# Altium PCB PCB_2.PcbDoc
Units mil, origin at the board's own origin, x right, y up, seen from the top; angles counter-clockwise.
Board outline 3571.53 x 1636.53 mil, 2 copper layers (Top Layer, Bottom Layer); 40 components, 24 nets, 88 pads, 2 vias.
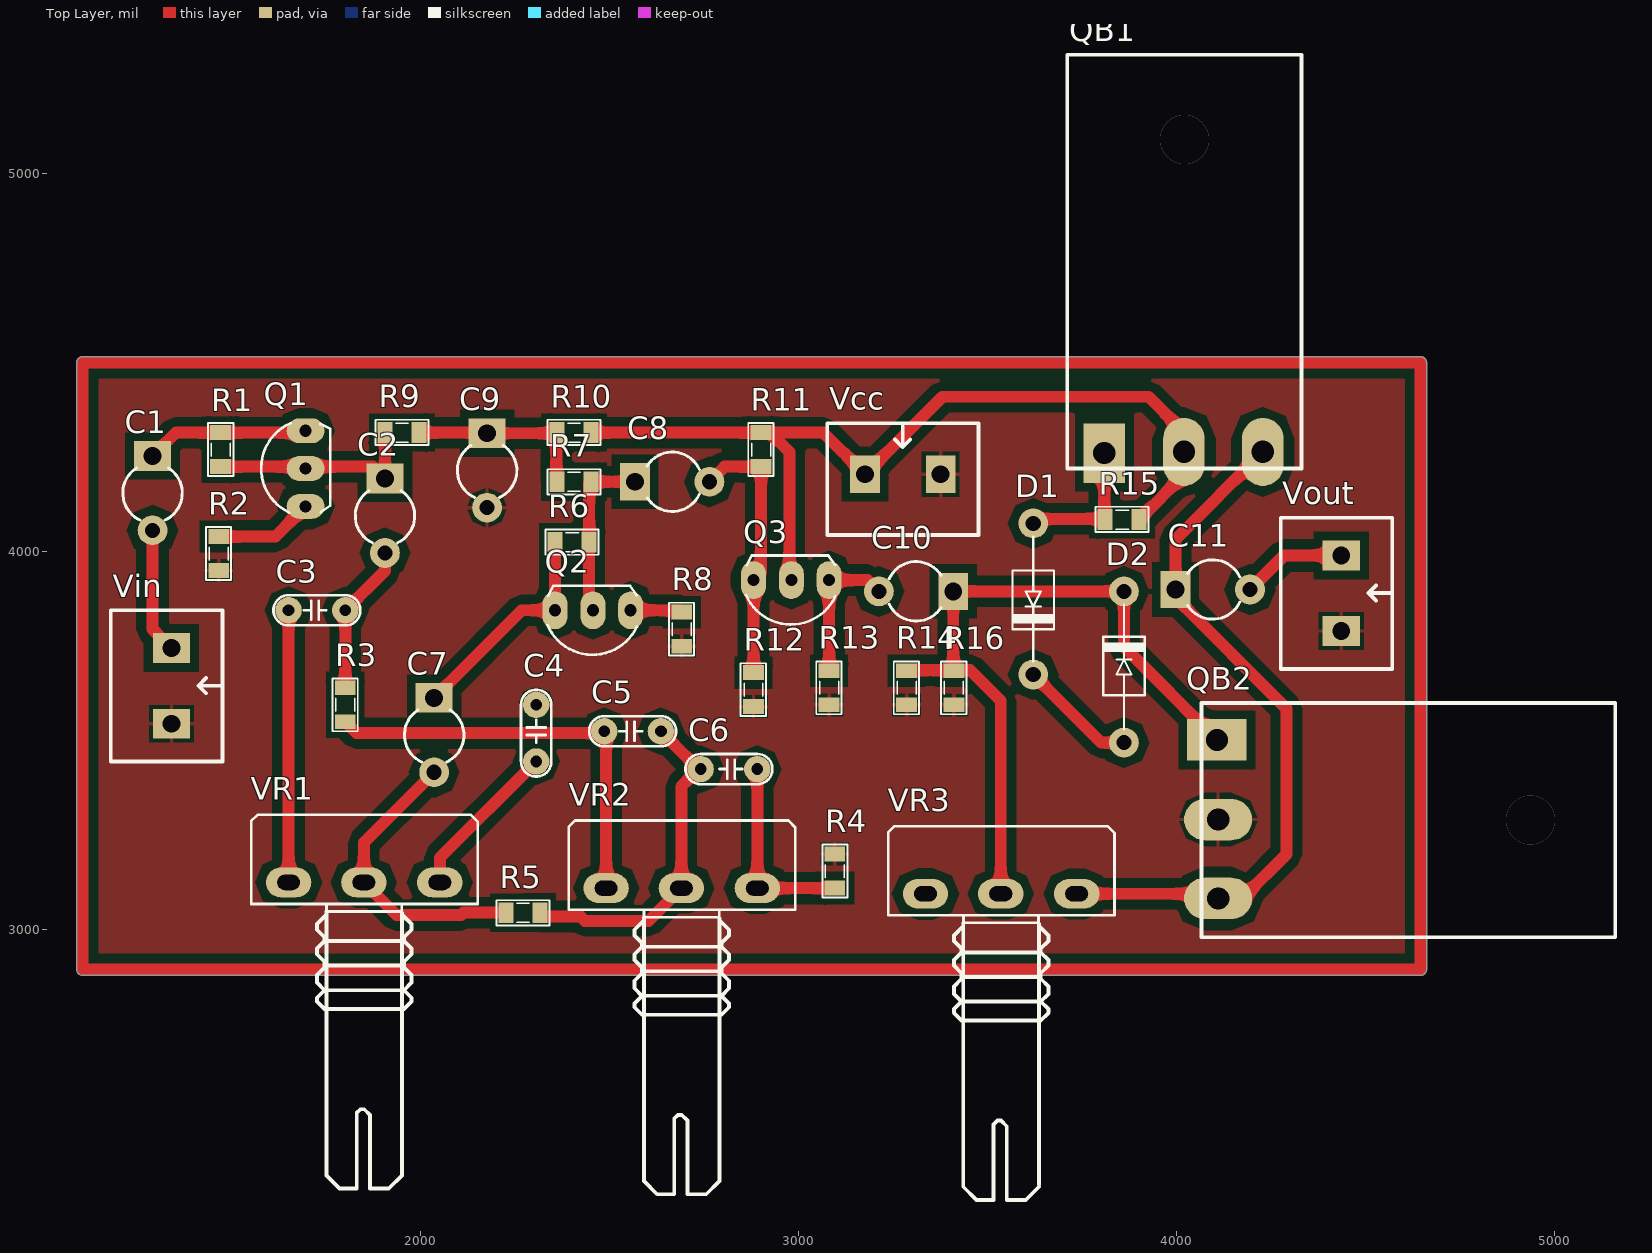
[diagram p0: Top Layer view]
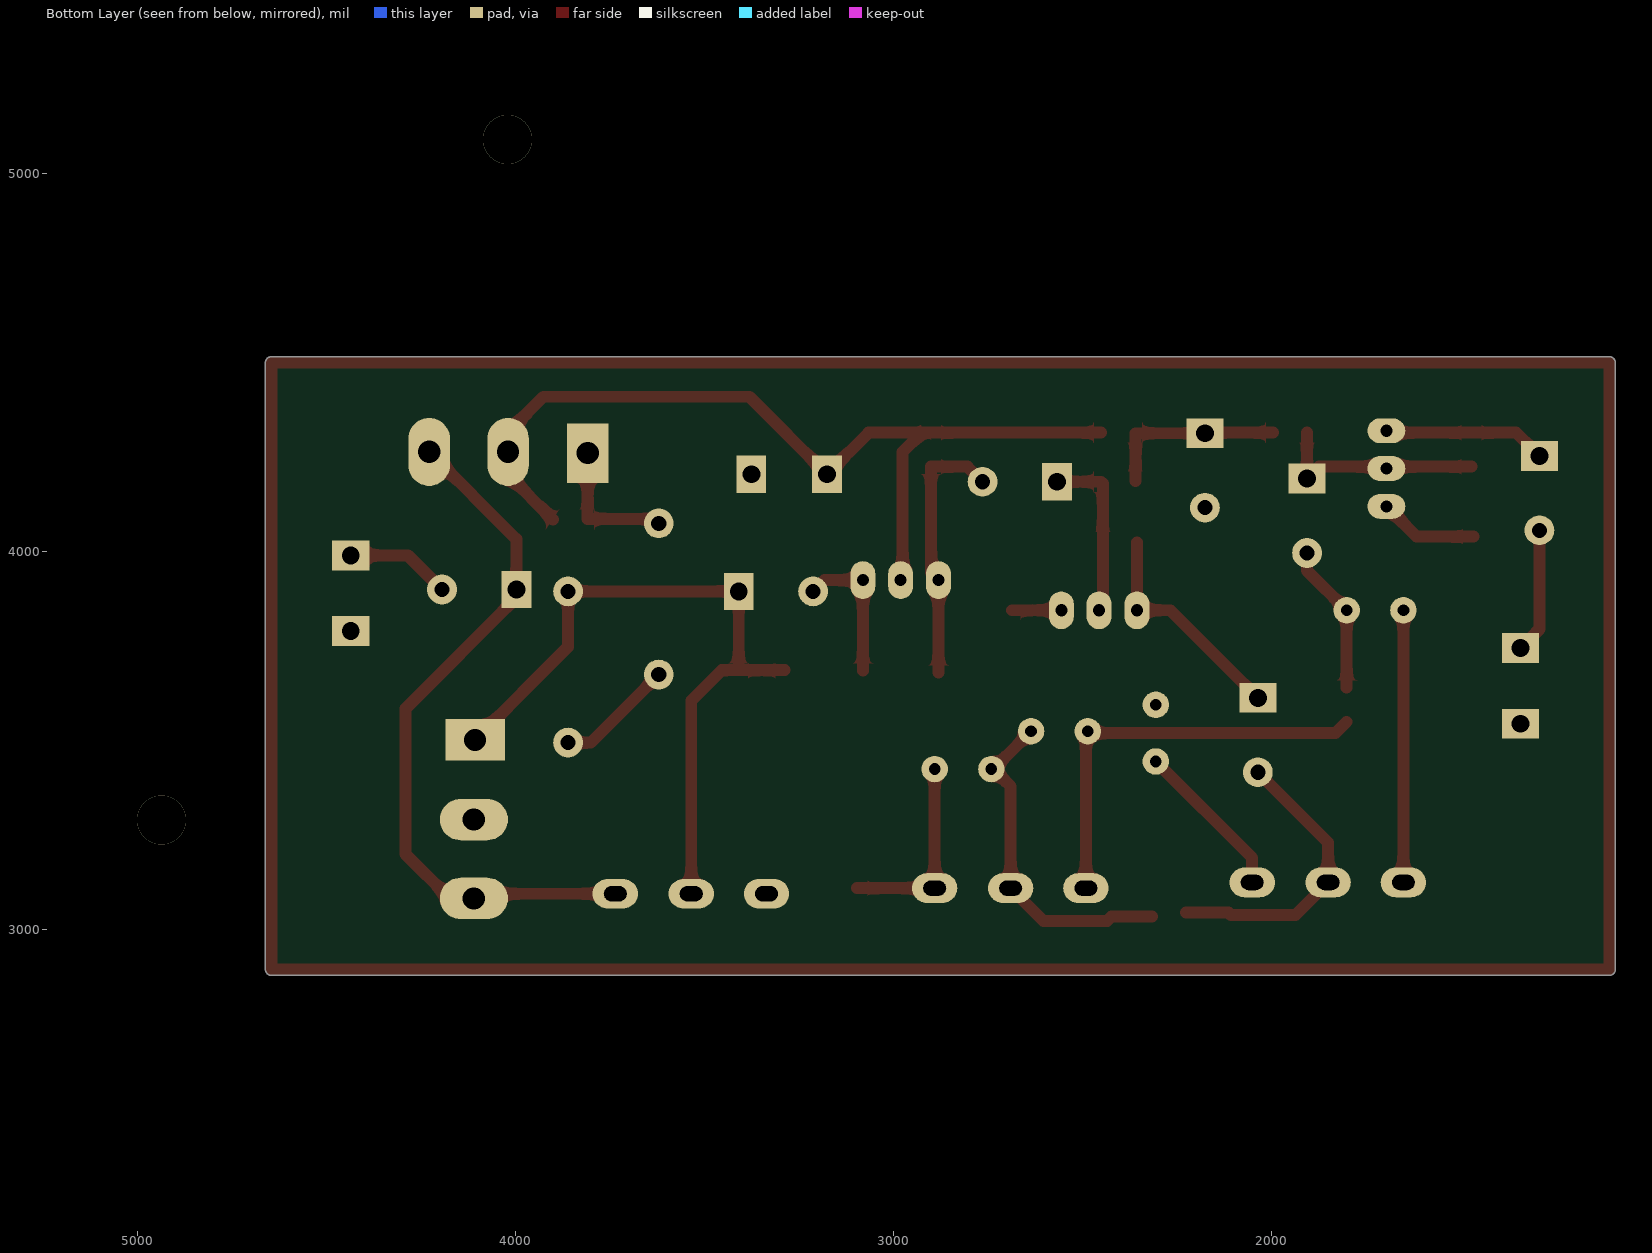
[diagram p1: Bottom Layer view, seen from below]
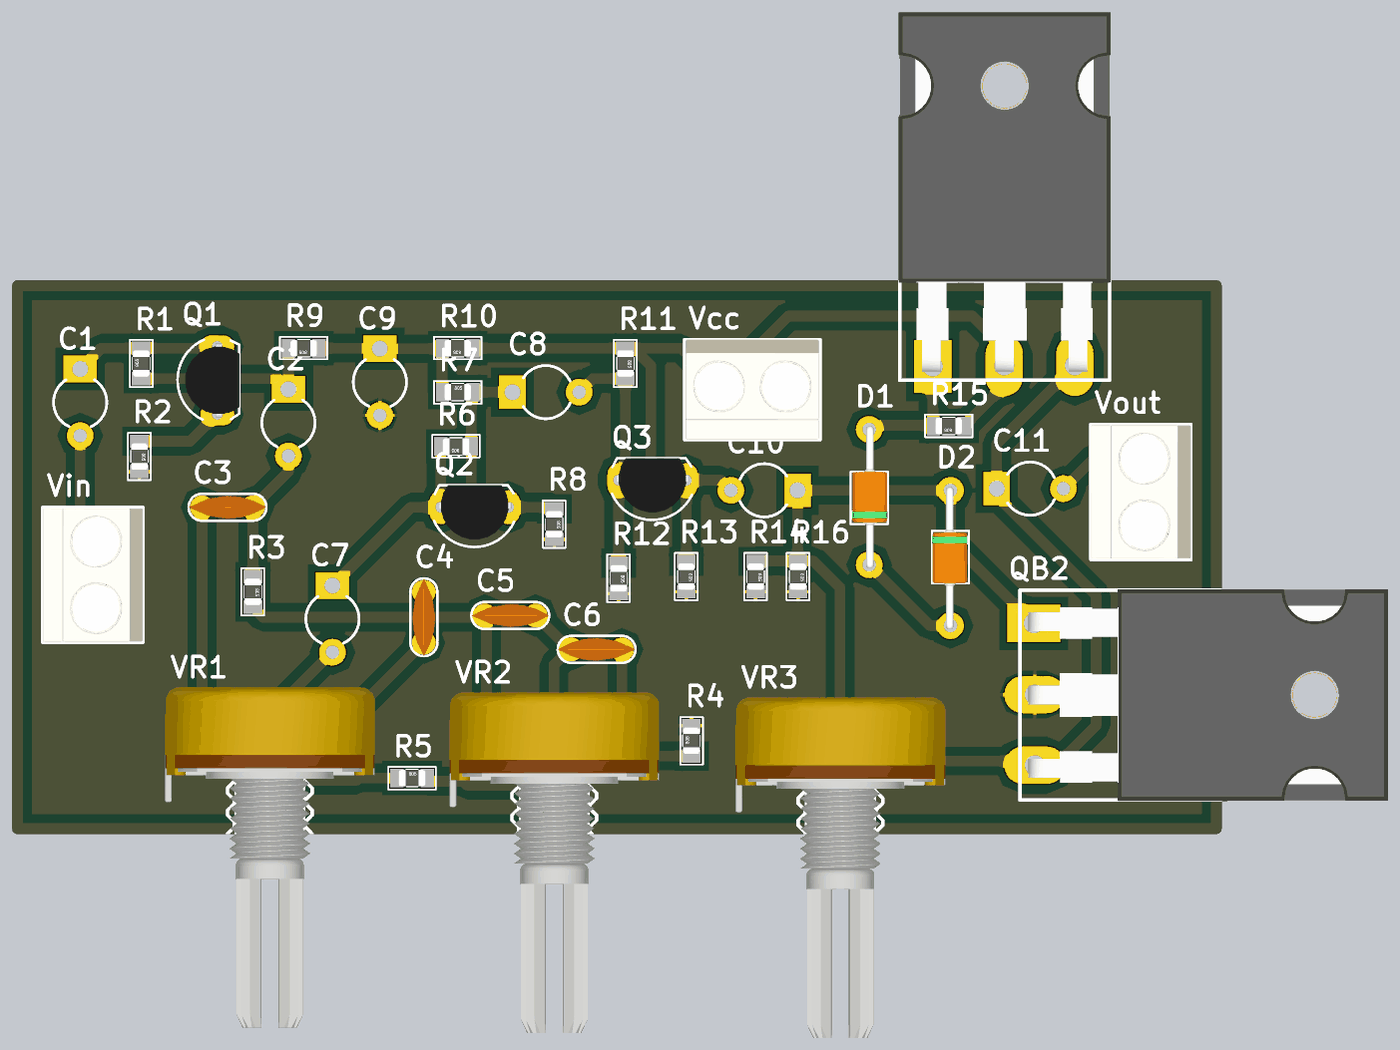
[diagram p2: 3D render of the assembled board from above, using the file's embedded part models]

## Layer stack, top to bottom
Top Solder: solder mask 0.4, Solder Resist, Dk 3.5
Top Layer: signal copper 1.4
Dielectric 1: dielectric 12.6, FR-4, Dk 4.8
Bottom Layer: signal copper 1.4
Bottom Solder: solder mask 0.4, Solder Resist, Dk 3.5

## Board outline
1105,2879.24 cw(c1105,2895) 1089.24,2895 1089.24,4500 cw(c1105,4500) 1105,4515.76 4645,4515.76 cw(c4645,4500) 4660.76,4500 4660.76,2895 cw(c4645,2895) 4645,2879.24

## Design rules (kind name [scope] priority, off if disabled: settings)
Clearance [All] p1: gap=23.62
PolygonConnect [All] p1: connectstyle=Relief reliefconductorwidth=10 reliefentries=4 polygonreliefangle="90 Angle" airgapwidth=10
RoutingVias [All] p1: holewidth=28 width=50 viastyle="Through Hole" minholewidth=28 minwidth=50 maxholewidth=28 maxwidth=50
SolderMaskExpansion [All] p1: expansion=4
Width [All] p1: maxlimit=39.37 minlimit=31.5 preferedwidth=31.5
30 further rules are at their usual default settings.

## Components (designator, comment, footprint, x,y, rotation, side; value= is the part's Value field where it differs from the comment)
C1 "Cap2" CAPR5-4X5 1290,4155 r270 top
C2 "Cap2" CAPR5-4X5 1905,4095 r270 top
C3 "Cap Non-Pol" CN1.5 1650,3845 r0 top
C4 "Cap Non-Pol" CN1.5 2305,3595 r270 top
C5 "Cap Non-Pol" CN1.5 2485,3525 r0 top
C6 "Cap Non-Pol" CN1.5 2890,3425 r180 top
C7 "Cap2" CAPR5-4X5 2035,3515 r270 top
C8 "Cap2" CAPR5-4X5 2665,4185 r0 top
C9 "Cap2" CAPR5-4X5 2175,4215 r270 top
C10 "Cap2" CAPR5-4X5 3310,3895 r180 top
C11 "Cap2" CAPR5-4X5 4095,3900 r0 top
D1 "Diode" DIO-1A 3620,4075 r270 top
D2 "Diode" DIO-1A 3860,3495 r90 top
Q1 "C1815" QTO-92 1695,4220 r90 top
Q2 "C1815" QTO-92 2455,3845 r180 top
Q3 "C1815" QTO-92 2980,3925 r180 top
QB1 "2SD718" TO247h 3805,4260 r0 top
QB2 "2SB688" TO247h 4105,3505 r270 top
R1 "1Meg" RES-SMD-0805 1470,4270 r90 top
R2 "220" RES-SMD-0805 1465,3995 r270 top
R3 "10k" RES-SMD-0805 1800,3595 r270 top
R4 "1.2k" RES-SMD-0805 3095,3155 r90 top
R5 "10k" RES-SMD-0805 2270,3045 r0 top
R6 "1Meg" RES-SMD-0805 2400,4025 r180 top
R7 "15k" RES-SMD-0805 2405,4185 r0 top
R8 "470" RES-SMD-0805 2690,3795 r270 top
R9 "15k" RES-SMD-0805 1950,4315 r180 top
R10 "4.7k" RES-SMD-0805 2405,4315 r180 top
R11 "15k" RES-SMD-0805 2900,4270 r270 top
R12 "15k" RES-SMD-0805 2880,3635 r270 top
R13 "220" RES-SMD-0805 3080,3640 r270 top
R14 "22k" RES-SMD-0805 3285,3640 r270 top
R15 "1k" RES-SMD-0805 3855,4085 r180 top
R16 "1k" RES-SMD-0805 3410,3640 r270 top
Vcc "Domino 2" "DOMINO 2- 5mm" 3275,4205 r0 top
Vin "Domino 2" "DOMINO 2- 5mm" 1340,3645 r270 top
Vout "Domino 2" "DOMINO 2- 5mm" 4435,3890 r270 top
VR1 "50K" VR-S1 1850,3125 r0 top
VR2 "50K" VR-S1 2690,3110 r0 top
VR3 "50K" VR-S1 3535,3095 r0 top

## Footprints (in the part's own frame and the unit in brackets; to place one, negate y for a bottom-side part, rotate by r counter-clockwise, add the part's x,y. Pads: shape width x height; smd on the part's side, far side on the other; paste and mask are expansions set on the pad)
CAPR5-4X5 [mm] "Capacitor; 2 Leads"
  rect 2x2.5 hole 1.2: 1(-2.5,0)
  round 2 hole 1.016: 2(2.5,0)
  silkscreen extent -1.69,-2 1.82,2
CN1.5 [mil]
  round 70 hole 31: 1(0,0) 2(150,0)
  silkscreen extent -40,-40 190,40, body extent -40,-33 190,33, height 235
DIO-1A [mm]
  round 2 hole 1.016: 1(0,0) 2(10.16,0)
  silkscreen extent 0.89,-1.4 9.27,1.4, body extent -0.28,-1.27 10.44,1.38, height 2.6
"DOMINO 2- 5mm" [mm]
  rect 2x2.5 hole 1.2: 1(-2.54,0) 2(2.54,0)
  silkscreen extent -5.08,-4.08 5.08,3.43, body extent -5,-4.07 5,3.43, height 10
QTO-92 [mil] "TO-92"
  oval 66x100 hole 32: 1(-100,0) 2(0,0) 3(100,0)
  silkscreen extent -117,-65 120,118, body extent -109,-66 109,95, height 245
RES-SMD-0805 [mil]
  rect 39.37x55 smd: 1(-45,0) 2(45,0)
  silkscreen extent -70,-34 70,33, body extent -39,-25 39,25, height 31
TO247h [mil]
  rect 110x157.48 hole 59.06: 1(3,1)
  oval 110x180 hole 59.06: 2(213.66,4) 3(422.32,4)
  silkscreen extent -95,-40 525,1055, body extent -98,-15 528,1047, height 213
VR-S1 [mil]
  oval 120x78.74 hole 40 slot 60 at 0 deg: 1(-200,0) 2(-1,0) 3(200,0)
  silkscreen extent -299,-810 300,179, body extent -310,-818 310,188, height 839

## Part data
C1 C2 C3 C4 C5 C6 C7 C8 C9 C10 C11: "Capacitor"
D1 D2: "Default Diode"
Q1 Q2 Q3: "NPN Bipolar Transistor"
QB1: library part 2SC5200, "Transistor Power Supply"
QB2: "Transistor Power Supply"
R1 R2 R3 R4 R5 R6 R7 R8 R9 R10 R11 R12 R13 R14 R15 R16: library part Res-SMD, "Resistor"
Vcc Vin Vout: "Domino, 2-Pin"
VR1 VR2 VR3: library part VR-S, "Var Resistor"

## Via types
v1: diameter 129.92, hole 129.92, Top Layer to Bottom Layer, 2 vias

## Nets (pads, with @x,y where several pads share a name; then routed paths per layer and width w, separated by ;. In a path a pad name is that pad's centre, name@x,y a point inside that pad or via, vN(x,y) a via of type N, cw(c..) or ccw(c..) an arc to the next point about the centre after c; other vN are vias at no path point)
GND: C4.1 C9.2 QB2.2 R2.2 R4.2 R8.2 R12.2 R13.2 R14.2 R16.2 Vcc.2 Vin.2 Vout.2
NetC1_1: C1.1 Q1.3 R1.2 | length 425.5
  Top Layer w31.5: C1.1 1351.57,4315 R1.2 Q1.3@1690,4315
NetC1_2: C1.2 Vin.1 | length 332.3
  Top Layer w31.5: C1.2 1290,3795 Vin.1
NetC2_1: C2.1 Q1.2 R1.1 R9.2 | length 569.7
  Top Layer w31.5: R1.1 1873.43,4225 C2.1 R9.2
NetC2_2: C2.2 C3.2 R3.1 | length 400.1
  Top Layer w31.5: R3.1 C3.2 1905,3950 C2.2
NetC3_1: C3.1 VR1.1 | length 720
  Top Layer w31.5: VR1.1 C3.1
NetC4_2: C4.2 VR1.3 | length 425.6
  Top Layer w31.5: VR1.3 2050,3190 C4.2
NetC5_1: C5.1 R3.2 VR2.1 | length 1112.4
  Top Layer w31.5: R3.2 1830,3520 2490,3520 VR2.1
NetC5_2: C5.2 C6.2 R5.2 VR2.2 | length 890.2
  Top Layer w31.5: R5.2@2315,3035 2421.88,3035 2433.49,3023.39 2602.39,3023.39 VR2.2 2689,3379 2735,3425 C5.2
NetC6_1: C6.1 R4.1 VR2.3 | length 520
  Top Layer w31.5: C6.1 VR2.3 R4.1
NetC7_1: C7.1 Q2.3 R6.2 | length 595.9
  Top Layer w31.5: C7.1 2266.57,3845 Q2.3 R6.2
NetC7_2: C7.2 R5.1 VR1.2 | length 783.2
  Top Layer w31.5: C7.2 1849,3230.57 VR1.2 1935.61,3038.39 2106.51,3038.39 2113.12,3045 R5.1
NetC8_1: C8.1 Q2.2 R6.1 R7.2 | length 455.7
  Top Layer w31.5: R7.2@2445,4180 R6.1 2445,3855 Q2.2 ; R7.2 C8.1
NetC9_1: C9.1 R7.1 R9.1 R10.2 | length 488.7
  Top Layer w31.5: R9.1 C9.1@2173.43,4315 ; C9.1 2358.43,4313.43 R7.1@2358.43,4186.57
NetC10_1: C10.1 D2.2 QB2.1 R14.1 R16.1 VR3.2 | length 1946.7
  Top Layer w31.5: R14.1@3286.57,3686.58 R16.1@3408.43,3686.58 ; VR3.2 3534,3606 3453.42,3686.58 R16.1@3408.43,3686.58 ; QB2.1 3860,3748 D2.2 C10.1 R16.1@3408.43,3686.58
NetC10_2: C10.2 Q3.1 R13.1 | length 384
  Top Layer w31.5: R13.1 Q3.1 3181.57,3925 C10.2
NetC11_1: C11.1 QB1.3 QB2.3 VR3.3 | length 1872.4
  Top Layer w31.5: VR3.3 QB2.3@4096.68,3095 ; QB2.3 4172.68,3082.68 4290,3200 4290,3585 3996.57,3878.43 C11.1 3996.57,4033.25 QB1.3
NetC11_2: C11.2 Vout.1 | length 278.9
  Top Layer w31.5: C11.2 4283.43,3990 Vout.1
NetD1_1: D1.1 QB1.1 R15.2 | length 350
  Top Layer w31.5: D1.1@3632,4087 3808,4087 QB1.1
NetD1_2: D1.2 D2.1 | length 314.6
  Top Layer w31.5: D1.2 3800,3495 D2.1
NetQ1_1: Q1.1 R2.1 | length 263.1
  Top Layer w31.5: R2.1 1615,4040 Q1.1
NetQ2_1: Q2.1 R8.1 | length 130
  Top Layer w31.5: Q2.1 R8.1@2685,3845
V1: C8.2 Q3.3 R11.2 R12.1 | length 678.5
  Top Layer w31.5: C8.2 2803.43,4225 R11.2 2899.76,4224.76 Q3.3@2899.76,3944.76 ; R12.1 Q3.3
VCC: Q3.2 QB1.2 R10.1 R11.1 R15.1 Vcc.1 | length 2448.2
  Top Layer w31.5: R10.1 2924,4315 2974.74,4264.26 Q3.2@2974.74,3930.26 ; R11.1 3065,4315 Vcc.1 3380,4410 3925,4410 4018.66,4316.34 QB1.2 4018.66,4203.66 R15.1
pads on no net: VR3.1
copper on no net: | length 10290
  Top Layer w31.5: 1105,2895 1105,4500 4645,4500 4645,2895 1105,2895
  other v1: 4935,3290 4020,5090

## Polygon pours and split planes (outlines as drawn)
GND on Top Layer "Top Layer-No Net" (solid, pour order 6): 1105,4500 4630,4500 4635,4505 4645,4495 4645,2895 1110,2895 1095,2910